# EAGLE board untitled (EAGLE 9.1.0)

Size 58.09 x 20.31 mm. Coordinates in mm from the lower left corner, seen from the top.
Outline: 0,0 58.09,0 58.09,20.31 0,20.31 0,0
Copper layers (1*16): Top 0.035mm / dielectric 1.5mm / Bottom 0.035mm
Design rules "default": minimum track width 6mil, minimum drill 0.35mm, track to track 6mil, track to pad 6mil, pad to pad 6mil, via to via 6mil, smd to smd 6mil, copper to edge 40mil, drill to drill 6mil, minimum pad ring 10mil, minimum via ring 8mil, stop-mask expansion 4mil, vias tented up to drill 0mil, thermal gap 10mil

## Footprints (pad centres in the part's own frame; a part is rotated, then mirrored left to right if it is on the bottom)
1X22 = drill 1.016 long: 1 -26.67,0; 2 -24.13,0; 3 -21.59,0; 4 -19.05,0; 5 -16.51,0; 6 -13.97,0; 7 -11.43,0; 8 -8.89,0; 9 -6.35,0; 10 -3.81,0; 11 -1.27,0; 12 1.27,0; 13 3.81,0; 14 6.35,0; 15 8.89,0; 16 11.43,0; 17 13.97,0; 18 16.51,0; 19 19.05,0; 20 21.59,0; 21 24.13,0; 22 26.67,0
DBT0044A_L = smd 1.2 x 0.25: 1 -2.85,5.25; 2 -2.85,4.75; 3 -2.85,4.25; 4 -2.85,3.75; 5 -2.85,3.25; 6 -2.85,2.75; 7 -2.85,2.25; 8 -2.85,1.75; 9 -2.85,1.25; 10 -2.85,0.75; 11 -2.85,0.25; 12 -2.85,-0.25; 13 -2.85,-0.75; 14 -2.85,-1.25; 15 -2.85,-1.75; 16 -2.85,-2.25; 17 -2.85,-2.75; 18 -2.85,-3.25; 19 -2.85,-3.75; 20 -2.85,-4.25; 21 -2.85,-4.75; 22 -2.85,-5.25; 23 2.85,-5.25; 24 2.85,-4.75; 25 2.85,-4.25; 26 2.85,-3.75; 27 2.85,-3.25; 28 2.85,-2.75; 29 2.85,-2.25; 30 2.85,-1.75; 31 2.85,-1.25; 32 2.85,-0.75; 33 2.85,-0.25; 34 2.85,0.25; 35 2.85,0.75; 36 2.85,1.25; 37 2.85,1.75; 38 2.85,2.25; 39 2.85,2.75; 40 2.85,3.25; 41 2.85,3.75; 42 2.85,4.25; 43 2.85,4.75; 44 2.85,5.25

## Placement (x,y rotation side)
,  [1X22]  29.21,17.78 180 top
.  [1X22]  29.21,2.54 0 top
U1  76940  [DBT0044A_L]  27.94,10.16 270 top

## Library data of the parts
, . = pinhead
U1 = ti

## Nets
N$1: ..14 ..19 U1.36 U1.41
N$2: ,.1 U1.1
N$3: ,.2 U1.2
N$4: ,.3 U1.3
N$5: ,.4 U1.4
N$6: ,.5 U1.5
N$7: ,.6 U1.6
N$8: ,.7 U1.7
N$9: ,.8 U1.8
N$10: ,.9 U1.9
N$11: ,.10 U1.10
N$12: ,.11 U1.11
N$13: ,.12 U1.12
N$14: ,.13 U1.13
N$15: ,.14 U1.14
N$16: ,.15 U1.15
N$17: ,.16 U1.16
N$18: ,.17 U1.17
N$19: ,.18 U1.18
N$20: ,.19 U1.19
N$21: ,.20 U1.20
N$22: ,.21 U1.21
N$23: ,.22 U1.22
N$24: ..1 U1.23
N$25: ..2 U1.24
N$26: ..3 U1.25
N$27: ..4 U1.26
N$28: ..5 U1.27
N$29: ..6 U1.28
N$30: ..7 U1.29
N$31: ..8 U1.30
N$32: ..9 U1.31
N$33: ..10 U1.32
N$34: ..11 U1.33
N$35: ..12 U1.34
N$36: ..13 U1.35
N$37: ..15 U1.37
N$38: ..16 U1.38
N$39: ..17 U1.39
N$40: ..18 U1.40
N$41: ..21 U1.43
N$42: ..20 U1.42
N$43: ..22 U1.44

## Tracks (layer width: path | path; a pad name or v marks a point on that pad's centre or on a via)
N$1  (3 unrouted)
N$2  (1 unrouted)
N$3  (1 unrouted)
N$4  (1 unrouted)
N$5  (1 unrouted)
N$6  (1 unrouted)
N$7  (1 unrouted)
N$8  (1 unrouted)
N$9  (1 unrouted)
N$10  (1 unrouted)
N$11  (1 unrouted)
N$12  (1 unrouted)
N$13  (1 unrouted)
N$14  (1 unrouted)
N$15  (1 unrouted)
N$16  (1 unrouted)
N$17  (1 unrouted)
N$18  (1 unrouted)
N$19  (1 unrouted)
N$20  (1 unrouted)
N$21  (1 unrouted)
N$22  (1 unrouted)
N$23  (1 unrouted)
N$24  (1 unrouted)
N$25  (1 unrouted)
N$26  (1 unrouted)
N$27  (1 unrouted)
N$28  (1 unrouted)
N$29  (1 unrouted)
N$30  (1 unrouted)
N$31  (1 unrouted)
N$32  (1 unrouted)
N$33  (1 unrouted)
N$34  (1 unrouted)
N$35  (1 unrouted)
N$36  (1 unrouted)
N$37  (1 unrouted)
N$38  (1 unrouted)
N$39  (1 unrouted)
N$40  (1 unrouted)
N$41  (1 unrouted)
N$42  (1 unrouted)
N$43  (1 unrouted)

## Text on the board
tNames: 22 21 20 19 18 17 16 15 14 13 12 11 10 9 8 7 6 5 4 3 2 1 | 23 24 25 26 27 28 29 30 31 32 33 34 35 36 37 38 39 40 41 42 43 44